# Altium PCB IMU_Project2.PcbDoc
Units mm, origin at the board's own origin, x right, y up, seen from the top; angles counter-clockwise.
Board outline 33 x 33 mm, 2 copper layers (Top Layer, Bottom Layer); 23 components, 25 nets, 129 pads, 15 vias.
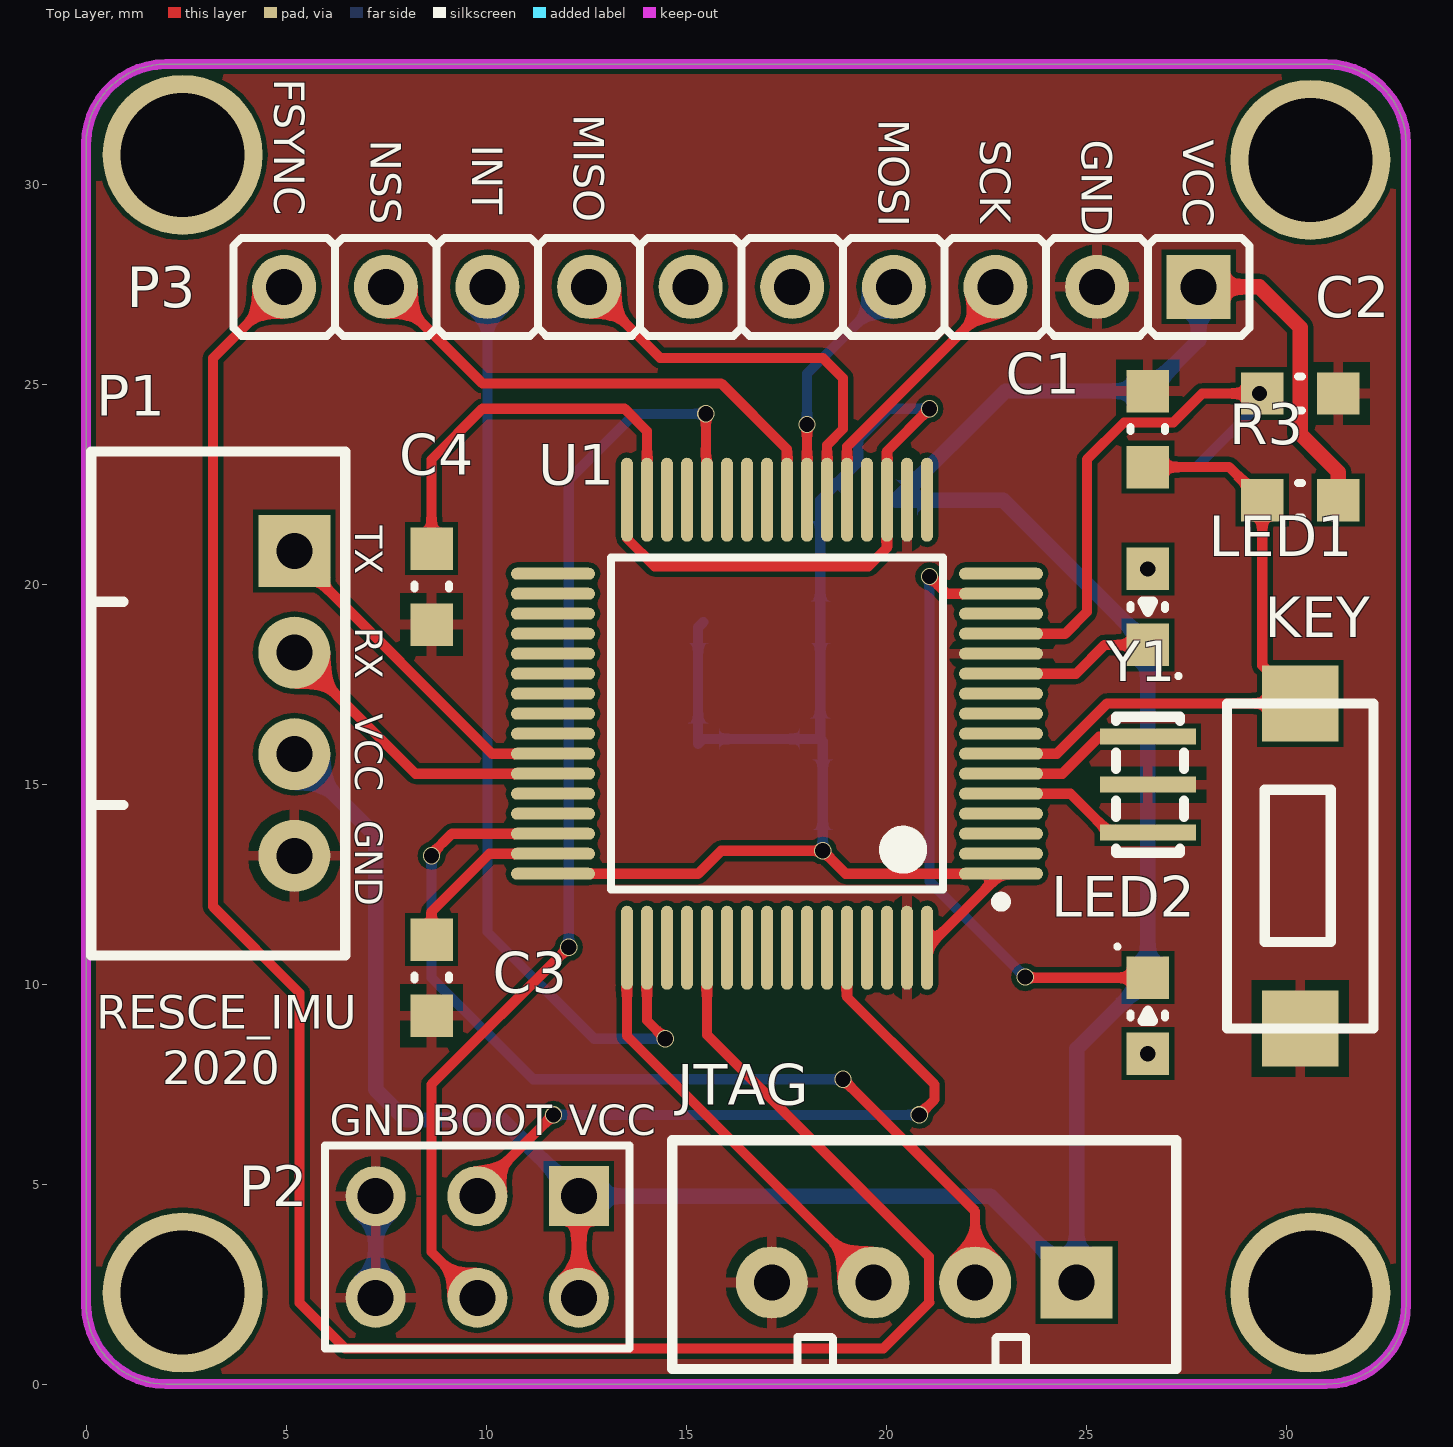
[diagram p0: Top Layer view]
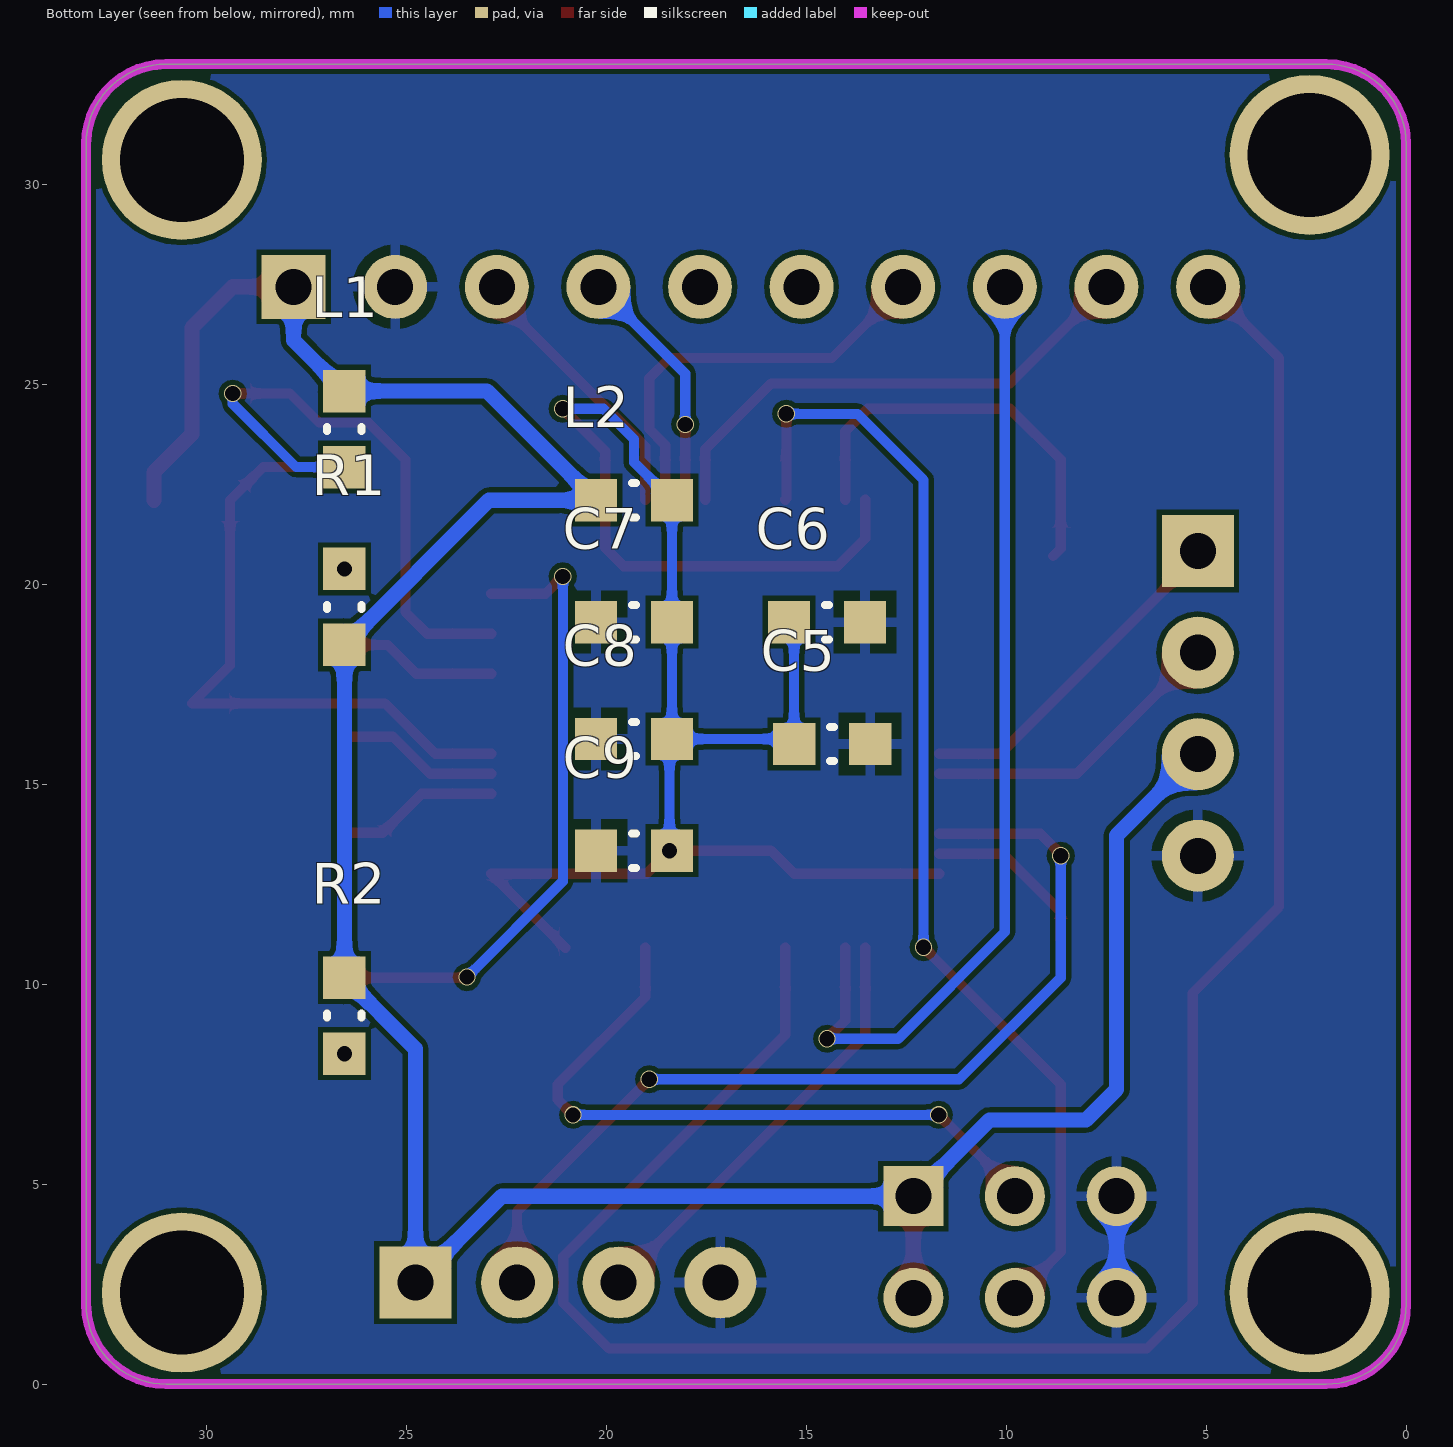
[diagram p1: Bottom Layer view, seen from below]

## Layer stack, top to bottom
Top Solder: solder mask 0.0102, Solder Resist, Dk 3.5
Top Layer: signal copper 0.0356
Dielectric 1: dielectric 0.32, FR-4, Dk 4.8
Bottom Layer: signal copper 0.0356
Bottom Solder: solder mask 0.0102, Solder Resist, Dk 3.5

## Board outline
0,2 ccw(c2,2) 2,0 31,0 ccw(c31,2) 33,2 33,31 ccw(c31,31) 31,33 2,33 ccw(c2,31) 0,31

## Design rules (kind name [scope] priority, off if disabled: settings)
Clearance [All] p1: gap=0.127 ignorepadtopadclearanceinfootprint=FALSE except(0: Arc-Hole Track-Hole SMDPad-Hole THPad-Hole Via-Hole Fill-Hole Poly-Hole Region-Hole Text-Hole)
HoleSize [All] p1 off: absolutevalues=TRUE maxlimit=2.54 minlimit=0.025 maxpercent=80.000 minpercent=20.000
HoleToHoleClearance [All] p1 off: gap=0.254 allowstackedmicrovias=TRUE
LayerPairs [All] p1 off: enforce=TRUE
MinimumSolderMaskSliver [All] p1 off: minsoldermaskwidth=0.254
NetAntennae [All] p1 off: netantennaetolerance=0
PolygonConnect [All] p1: connectstyle=Relief reliefconductorwidth=0.254 reliefentries=4 polygonreliefangle="90 Angle" airgapwidth=0.254
RoutingVias [All] p1: holewidth=0.711 width=1.27 viastyle="Through Hole" minholewidth=0.711 minwidth=1.27 maxholewidth=0.711 maxwidth=1.27
SilkToSilkClearance [All] p1 off: silktosilkclearance=0.254
SilkToSolderMaskClearance [IsPad] p1 off: minsilkscreentomaskgap=0.254 clearancetoexposedcopper=TRUE
SolderMaskExpansion [All] p1: expansion=0.102
Width GND [InNet('GND')] p1: maxlimit=0.381 minlimit=0.381 preferedwidth=0.381
Width VCC_3.3 [InNet('VCC_3.3')] p2: maxlimit=0.381 minlimit=0.381 preferedwidth=0.381
Width [All] p3: maxlimit=0.254 minlimit=0.254 preferedwidth=0.254
23 further rules are at their usual default settings.

## Components (designator, comment, footprint, x,y, rotation, side; value= is the part's Value field where it differs from the comment)
C1 "104" C0603 26.543,23.876 r90 top
C2 "104" C0603/1608 30.353,24.765 r0 top
C3 "225" C0603/1608 8.636,10.16 r90 top
C4 "225" C0603/1608 8.636,19.939 r90 top
C5 "104" C0603/1608 14.351,16.002 r0 bottom
C6 "104" C0603/1608 14.478,19.05 r0 bottom
C7 "104" C0603/1608 19.304,19.05 r180 bottom
C8 "104" C0603/1608 19.304,16.129 r180 bottom
C9 "104" C0603/1608 19.304,13.335 r180 bottom
JTAG "Header 4" Header1*4_XH2.54_zhi 11.811,3.556 r0 top (schematic designator JTAG1)
KEY "KEY2" KEY_RESET 30.226,12.827 r90 top (schematic designator KEY1)
L1 "UPZ1608E101" L0603/1608 26.543,23.876 r270 bottom
L2 "UPZ1608E101" L0603/1608 19.304,22.098 r180 bottom
LED1 "LED RED" LED0603 26.543,19.431 r270 top
LED2 "LED RED" LED0603 26.543,9.21 r90 top
P1 "Header-1*4P" Header1*4_XH2.54_Lie 5.207,17.018 r90 top
P2 "Header 3X2" BOOT 14.986,8.509 r270 top
P3 "MPU9250_Pin" MPU9250_Pin 27.813,27.432 r180 top
R1 "4K7" R0603 26.543,19.431 r270 bottom
R2 "4K7" R0603 26.543,9.21 r90 bottom
R3 "10kΩ" R0603 30.353,22.098 r0 top
U1 "STM32F405RGT6" LQFP64 17.272,16.51 r180 top
Y1 "Crystal_Cap" XTAL-3213 26.543,14.986 r90 top

## Footprints (in the part's own frame and the unit in brackets; to place one, negate y for a bottom-side part, rotate by r counter-clockwise, add the part's x,y. Pads: shape width x height; smd on the part's side, far side on the other; paste and mask are expansions set on the pad)
BOOT [mm]
  rect 1.5x1.5 hole 0.9: 1(3.81,-2.667)
  round 1.5 hole 0.9: 2(6.35,-2.667) 3(3.81,-5.207) 4(6.35,-5.207) 5(3.81,-7.747) 6(6.35,-7.747)
  silkscreen extent 2.54,-9.02 7.62,-1.4, body extent 2.54,-9.02 7.62,-1.4, height 8.38
C0603 [mm]
  rect 1.06x1.06 smd: 1(-0.95,0) 2(0.95,0)
  silkscreen extent -0.05,-0.43 0.05,0.43, body extent -0.85,-0.48 0.85,0.47, height 0.95
C0603/1608 [mm]
  rect 1.06x1.06 smd: 1(-0.95,0) 2(0.95,0)
  silkscreen extent -0.05,-0.43 0.05,0.43, body extent -1.29,-0.48 1.31,0.53, height 0.95
Header1*4_XH2.54_Lie [mm]
  rect 1.8x1.8 hole 0.9: 1(3.81,0)
  round 1.8 hole 0.9: 2(1.27,0) 3(-1.27,0) 4(-3.81,0)
  silkscreen extent -6.3,-1.27 6.3,5.08, body extent -6.3,-1.27 6.3,5.08, height 7
Header1*4_XH2.54_zhi [mm]
  rect 1.8x1.8 hole 0.9: 1(12.954,-1.016)
  round 1.8 hole 0.9: 2(10.414,-1.016) 3(7.874,-1.016) 4(5.334,-1.016)
  silkscreen extent 2.84,-3.17 15.44,2.54, body extent 2.97,-3.26 15.37,2.49, height 7
KEY_RESET [mil]
  rect 75x75 smd: 1(-155,-5) 2(165,-5)
  silkscreen extent -155,-77 165,67, body extent -175,-75 185,65, height 98
L0603/1608 [mm]
  rect 1.06x1.06 smd: 1(-0.95,0) 2(0.95,0)
  silkscreen extent -0.05,-0.43 0.05,0.43, body extent -0.9,-0.5 0.9,0.5, height 1
LED0603 [mm]
  rect 1.06x1.06 smd: 1(-0.95,0) 2(0.95,0)
  silkscreen extent -0.13,-0.43 1.78,0.81, body extent -0.85,-0.48 0.85,0.47, height 0.95
LQFP64 [mm]
  oval 2.1x0.3 smd: 1(-5.6,3.75) 2(-5.6,3.25) 3(-5.6,2.75) 4(-5.6,2.25) 5(-5.6,1.75) 6(-5.6,1.25) 7(-5.6,0.75) 8(-5.6,0.25) 9(-5.6,-0.25) 10(-5.6,-0.75) 11(-5.6,-1.25) 12(-5.6,-1.75) 13(-5.6,-2.25) 14(-5.6,-2.75) 15(-5.6,-3.25) 16(-5.6,-3.75) 33(5.6,-3.75) 34(5.6,-3.25) 35(5.6,-2.75) 36(5.6,-2.25) 37(5.6,-1.75) 38(5.6,-1.25) 39(5.6,-0.75) 40(5.6,-0.25) 41(5.6,0.25) 42(5.6,0.75) 43(5.6,1.25) 44(5.6,1.75) 45(5.6,2.25) 46(5.6,2.75) 47(5.6,3.25) 48(5.6,3.75)
  oval 0.3x2.1 smd: 17(-3.75,-5.6) 18(-3.25,-5.6) 19(-2.75,-5.6) 20(-2.25,-5.6) 21(-1.75,-5.6) 22(-1.25,-5.6) 23(-0.75,-5.6) 24(-0.25,-5.6) 25(0.25,-5.6) 26(0.75,-5.6) 27(1.25,-5.6) 28(1.75,-5.6) 29(2.25,-5.6) 30(2.75,-5.6) 31(3.25,-5.6) 32(3.75,-5.6) 49(3.75,5.6) 50(3.25,5.6) 51(2.75,5.6) 52(2.25,5.6) 53(1.75,5.6) 54(1.25,5.6) 55(0.75,5.6) 56(0.25,5.6) 57(-0.25,5.6) 58(-0.75,5.6) 59(-1.25,5.6) 60(-1.75,5.6) 61(-2.25,5.6) 62(-2.75,5.6) 63(-3.25,5.6) 64(-3.75,5.6)
  silkscreen extent -5.72,-4.15 4.15,4.57, body extent -6,-6 6,6, height 1.6
MPU9250_Pin [mm] "2.54mm间距单排立式排针10P"
  rect 1.6x1.6 hole 0.9: 1(0,0)
  round 1.6 hole 0.9: 2(2.54,0) 3(5.08,0) 4(7.62,0) 5(10.16,0) 6(12.7,0) 7(15.24,0) 8(17.78,0) 9(20.32,0) 10(22.86,0)
  silkscreen extent -1.27,-1.23 24.13,1.23, body extent -1.27,-1.27 24.13,1.27, height 8.54
R0603 [mm]
  rect 1.06x1.06 smd: 1(-0.95,0) 2(0.95,0)
  silkscreen extent -0.05,-0.43 0.05,0.43, body extent -0.85,-0.48 0.85,0.47, height 0.95
XTAL-3213 [mm]
  rect 0.4x2.4 smd: 1(-1.2,0) 2(0,0) 3(1.2,0)
  silkscreen extent -1.7,-0.9 1.7,0.8, body extent -1.63,-0.76 1.57,0.74, height 0.8

## Part data
C1: library part CAP_WYN
C2 C3 C4 C5 C6 C7 C8 C9: library part 陶瓷电容, "陶瓷电容"
JTAG: "Header, 4-Pin", LatestRevisionDate=17-Jul-2002, LatestRevisionNote="Re-released for DXP Platform.", Publisher="Altium Limited"
KEY: library part KEY
L1 L2: library part 磁珠, "贴片磁珠"
LED1 LED2: library part LED, Color=RED
P1: "单排4P排针"
P2: "Header, 3-Pin, Dual row", LatestRevisionDate=17-Jul-2002, LatestRevisionNote="Re-released for DXP Platform.", Publisher="Altium Limited"
R1 R2: library part Resistor
R3: library part RES_WYN
U1: "微控制器STM32F405RGT6"
Y1: LatestRevisionDate=17-Jul-2002, LatestRevisionNote="Re-released for DXP Platform.", Published=8-Jun-2000, Publisher="Altium Limited"

## Free pads (board coordinates)
  round 4 hole 3.1: 1(2.413,30.734) 2(2.413,2.286) 3(30.607,2.286) 4(30.607,30.607)

## Via types
v1: diameter 0.432, hole 0.381, Top Layer to Bottom Layer, 15 vias

## Nets (pads, with @x,y where several pads share a name; then routed paths per layer and width w, separated by ;. In a path a pad name is that pad's centre, name@x,y a point inside that pad or via, vN(x,y) a via of type N, cw(c..) or ccw(c..) an arc to the next point about the centre after c; other vN are vias at no path point)
BOOT0: P2.3 U1.60 | length 17.2
  Top Layer w0.254: P2.3 9.779,4.826 v1(11.684,6.731) ; U1.60 19.022,9.68 21.209,7.493 21.209,7.112 v1(20.828,6.731)
  Bottom Layer w0.254: v1(11.684,6.731) v1(20.828,6.731)
BOOT1: P2.4 U1.28 | length 28.6
  Top Layer w0.254: P2.4 8.636,3.302 8.636,7.493 v1(12.065,10.922) ; v1(15.494,24.257) 15.494,22.138 U1.28
  Bottom Layer w0.254: v1(12.065,10.922) 12.065,22.606 13.716,24.257 v1(15.494,24.257)
FSYNC: P3.10 U1.53 | length 54.9
  Top Layer w0.254: P3.10 3.175,25.654 3.175,11.938 5.334,9.779 5.334,2.032 6.477,0.889 19.931,0.889 21.082,2.04 21.071,2.051 21.071,3.186 15.522,8.735 U1.53
GND: C1.2 C2.2 C3.1 C4.1 C5.1 C6.1 C7.1 C8.1 C9.1 JTAG.4 KEY.1 P1.4 P2.5 P2.6 P3.2 U1.12 U1.18 U1.63 Y1.2 | length 2.5
  Bottom Layer w0.381: P2.6 P2.5
INT: P3.8 U1.50 | length 24.1
  Top Layer w0.254: U1.50 14.022,9.092 v1(14.478,8.636)
  Bottom Layer w0.254: P3.8 10.033,11.303 12.7,8.636 v1(14.478,8.636)
JTCK: JTAG.3 U1.49 | length 10.9
  Top Layer w0.254: U1.49 13.522,8.703 JTAG.3
JTMS: JTAG.2 U1.46 | length 24.1
  Top Layer w0.254: v1(8.636,13.208) 8.636,13.252 9.144,13.76 U1.46 ; v1(18.923,7.62) 22.225,4.318 JTAG.2
  Bottom Layer w0.254: v1(8.636,13.208) 8.636,10.16 11.176,7.62 v1(18.923,7.62)
LED: LED1.2 U1.11 | length 4
  Top Layer w0.254: U1.11 24.745,17.76 25.466,18.481 LED1.2
LED1: LED2.2 U1.15 | length 16
  Top Layer w0.254: v1(21.082,20.193) 21.515,19.76 U1.15 ; v1(23.479,10.176) 23.495,10.16 LED2.2
  Bottom Layer w0.254: v1(21.082,20.193) 21.082,12.573 v1(23.479,10.176)
NetC2_1: C2.1 L1.2 U1.13 | length 15
  Top Layer w0.254: U1.13 24.475,18.76 25.019,19.304 25.019,23.114 25.947,24.042 27.178,24.042 27.901,24.765 v1(29.337,24.765) C2.1
  Bottom Layer w0.254: L1.2 27.752,22.926 29.337,24.511 v1(29.337,24.765)
NetC3_2: C3.2 U1.47 | length 4.3
  Top Layer w0.254: C3.2 8.636,11.811 10.085,13.26 U1.47
NetC4_2: C4.2 U1.31 | length 10.3
  Top Layer w0.254: C4.2@8.824,20.701 C4.2 8.636,23.114 9.906,24.384 13.462,24.384 14.022,23.824 U1.31
NetC5_2: C5.2 C6.2 C7.2 C8.2 C9.2 L2.2 U1.1 U1.19 U1.32 U1.48 U1.64 | length 45.2
  Top Layer w0.254: U1.48 15.3,12.76 15.875,13.335 v1(18.415,13.335) 18.99,12.76 U1.1 U1.64 ; U1.32 13.522,21.139 14.214,20.447 19.558,20.447 20.022,20.911 U1.19 20.022,23.324 v1(21.082,24.384)
  Bottom Layer w0.254: C6.2 15.301,18.923 C5.2 15.428,16.129 C8.2 ; v1(18.415,13.335) 18.415,16.068 C8.2 ; v1(21.082,24.384) 20.066,24.384 19.304,23.622 19.304,23.048 L2.2 C7.2 C8.2
NetLED1_1: LED1.1 R1.1
  other v1: 26.543,20.381
NetLED2_1: LED2.1 R2.1
  other v1: 26.543,8.26
OSC_IN: U1.5 Y1.1 | length 4.1
  Top Layer w0.254: U1.5 24.61,14.76 25.584,13.786 Y1.1
OSC_OUT: U1.6 Y1.3 | length 4.1
  Top Layer w0.254: U1.6 24.404,15.26 25.33,16.186 Y1.3
RESET: C1.1 KEY.2 R3.1 U1.7 | length 16.7
  Top Layer w0.254: U1.7 24.269,15.76 25.527,17.018 KEY.2 29.403,17.968 R3.1 28.575,22.926 C1.1
SPI1_MISO: P3.7 U1.22 | length 10.5
  Top Layer w0.254: P3.7 14.351,25.654 18.415,25.654 18.923,25.146 18.923,23.876 18.522,23.475 U1.22
SPI1_MOSI: P3.4 U1.23 | length 6.2
  Top Layer w0.254: U1.23 v1(18.022,23.991)
  Bottom Layer w0.254: v1(18.022,23.991) 18.022,25.261 P3.4
SPI1_NSS: P3.9 U1.24 | length 13
  Top Layer w0.254: P3.9 9.906,25.019 15.875,25.019 17.522,23.372 U1.24
SPI1_SCK: P3.3 U1.21 | length 6.9
  Top Layer w0.254: U1.21 19.022,23.436 22.733,27.147 P3.3
U1_RX: P1.2 U1.43 | length 7.7
  Top Layer w0.254: P1.2 8.235,15.26 U1.43
U1_TX: P1.1 U1.42 | length 8.5
  Top Layer w0.254: P1.1@5.588,20.828 5.588,20.32 10.148,15.76 U1.42
VCC_3.3: JTAG.1 L1.1 L2.1 P1.3 P2.1 P2.2 P3.1 R1.2 R2.2 R3.2 | length 73.8
  Top Layer w0.381: P2.2 P2.1 ; P3.1 29.337,27.432 30.353,26.416 30.353,23.749 31.303,22.799 R3.2
  Bottom Layer w0.381: P1.3@5.588,15.748 5.588,15.367 7.239,13.716 7.239,7.366 8.001,6.604 10.414,6.604 P2.1 22.606,4.699 JTAG.1 24.765,8.382 R2.2 R1.2 22.926,22.098 L2.1 22.982,24.826 L1.1 27.813,26.096 P3.1
pads on no net: P3.5 P3.6 U1.2 U1.3 U1.4 U1.8 U1.9 U1.10 U1.14 U1.16 U1.17 U1.20 U1.25 U1.26 U1.27 U1.29 U1.30 U1.33 U1.34 U1.35 U1.36 U1.37 U1.38 U1.39 U1.40 U1.41 U1.44 U1.45 U1.51 U1.52 U1.54 U1.55 U1.56 U1.57 U1.58 U1.59 U1.61 U1.62

## Polygon pours and split planes (outlines as drawn)
GND on Top Layer "Top Layer-No Net" (solid, remove dead copper, pour order 18): -2.032,35.56 36.068,35.56 38.989,32.639 34.544,28.194 34.544,-0.762 -0.381,-0.762 -1.524,-1.905
GND on Bottom Layer "Top Layer-No Net" (solid, remove dead copper, pour order 20): -1.778,34.29 -1.651,34.417 33.655,34.417 33.655,-1.778 32.385,-0.508 -2.032,-0.508

## Keep-outs
Keep-Out Layer:
  the board outline again, w0.254

## Silkscreen, mask and mechanical layers (free items; w line width, h text height)
Top Overlay:
  text "FSYNC" at 4.699,32.639 h0.76 r270
  text "MISO" at 12.192,31.75 h0.76 r270
  text "MOSI" at 19.812,31.623 h0.76 r270
  text "NSS" at 7.112,31.115 h0.76 r270
  text "SCK" at 22.352,31.115 h0.76 r270
  text "GND" at 24.892,31.115 h0.76 r270
  text "VCC" at 27.432,31.115 h0.76 r270
  text "INT" at 9.652,30.988 h0.76 r270
  text "TX" at 6.731,21.463 h0.69 r270
  text "RX" at 6.731,18.923 h0.69 r270
  text "VCC" at 6.731,16.764 h0.69 r270
  text "GND" at 6.731,14.097 h0.69 r270
  text "RESCE_IMU" at 0.254,8.89 h0.84
  text "2020" at 1.905,7.493 h0.84
  text "GND" at 6.096,6.223 h0.76
  text "BOOT" at 8.636,6.223 h0.76
  text "VCC" at 12.065,6.223 h0.76